# Altium PCB PCB1.PcbDoc
Units mm, origin at the board's own origin, x right, y up, seen from the top; angles counter-clockwise.
Board outline 95 x 50 mm, 2 copper layers (Top Layer, Bottom Layer); 30 components, 16 nets, 106 pads, 11 vias.
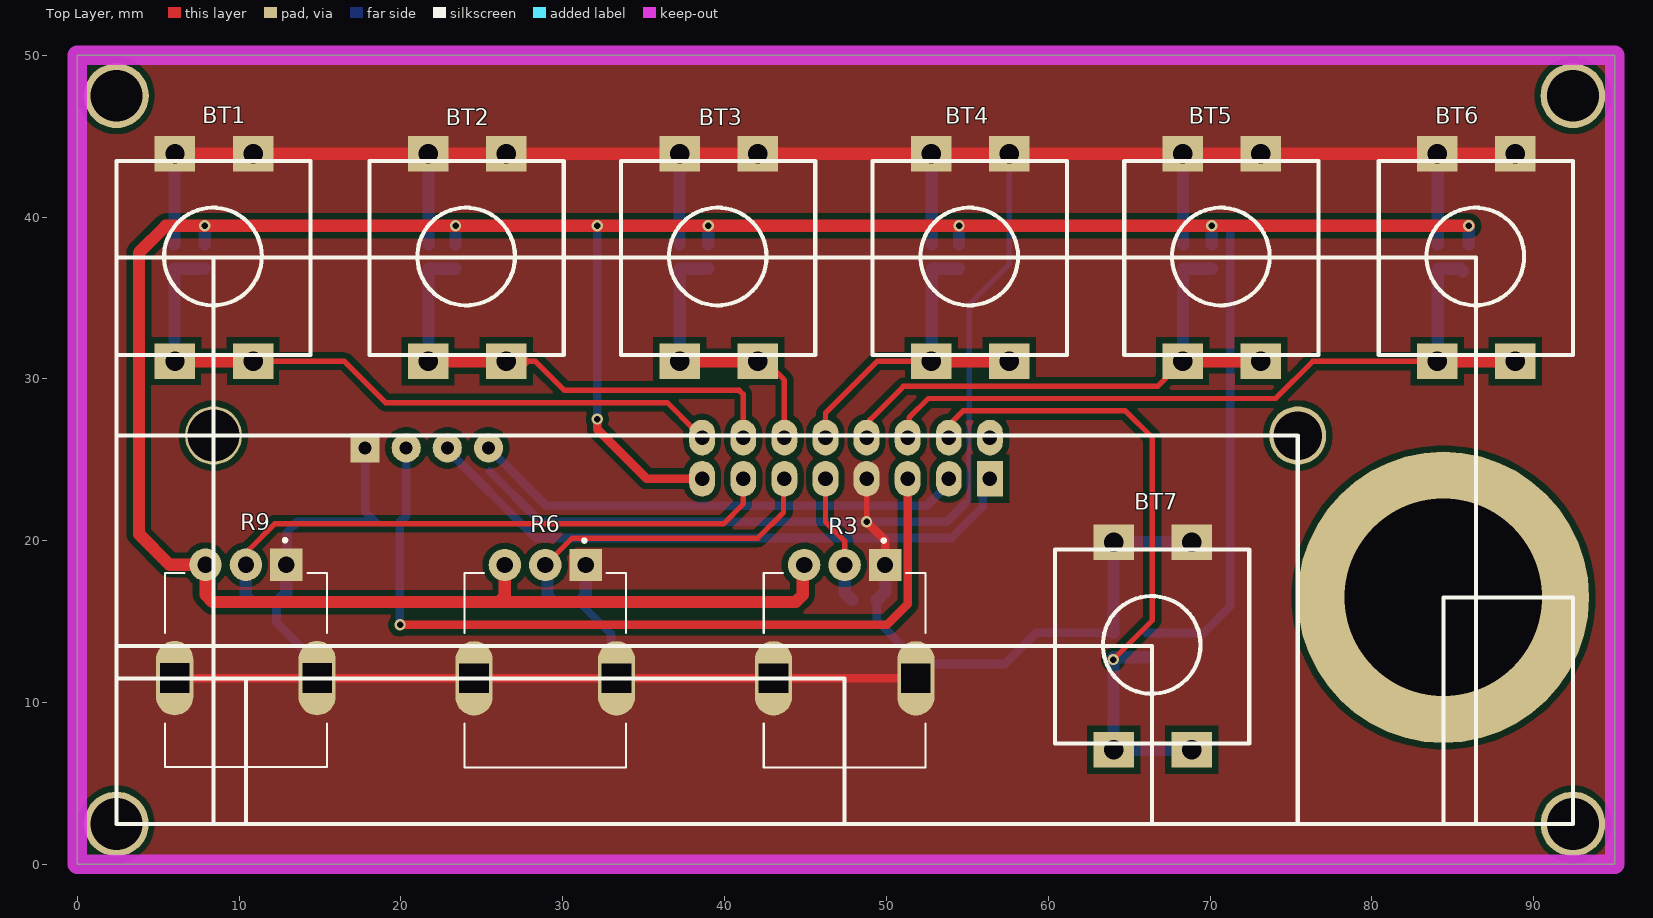
[diagram p0: Top Layer view]
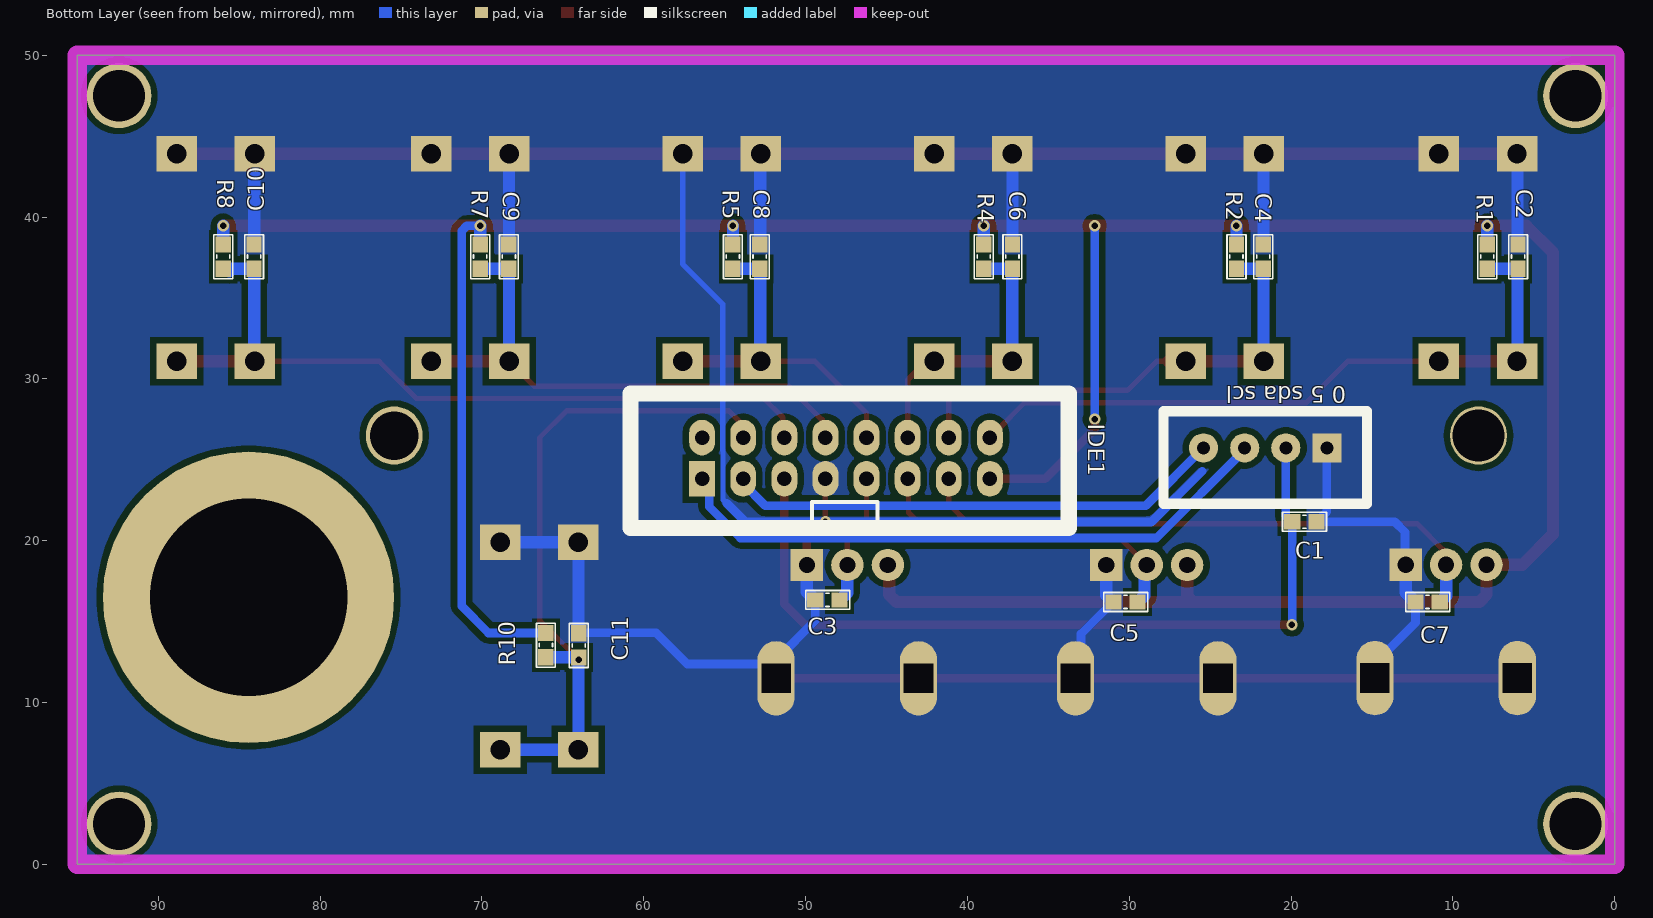
[diagram p1: Bottom Layer view, seen from below]
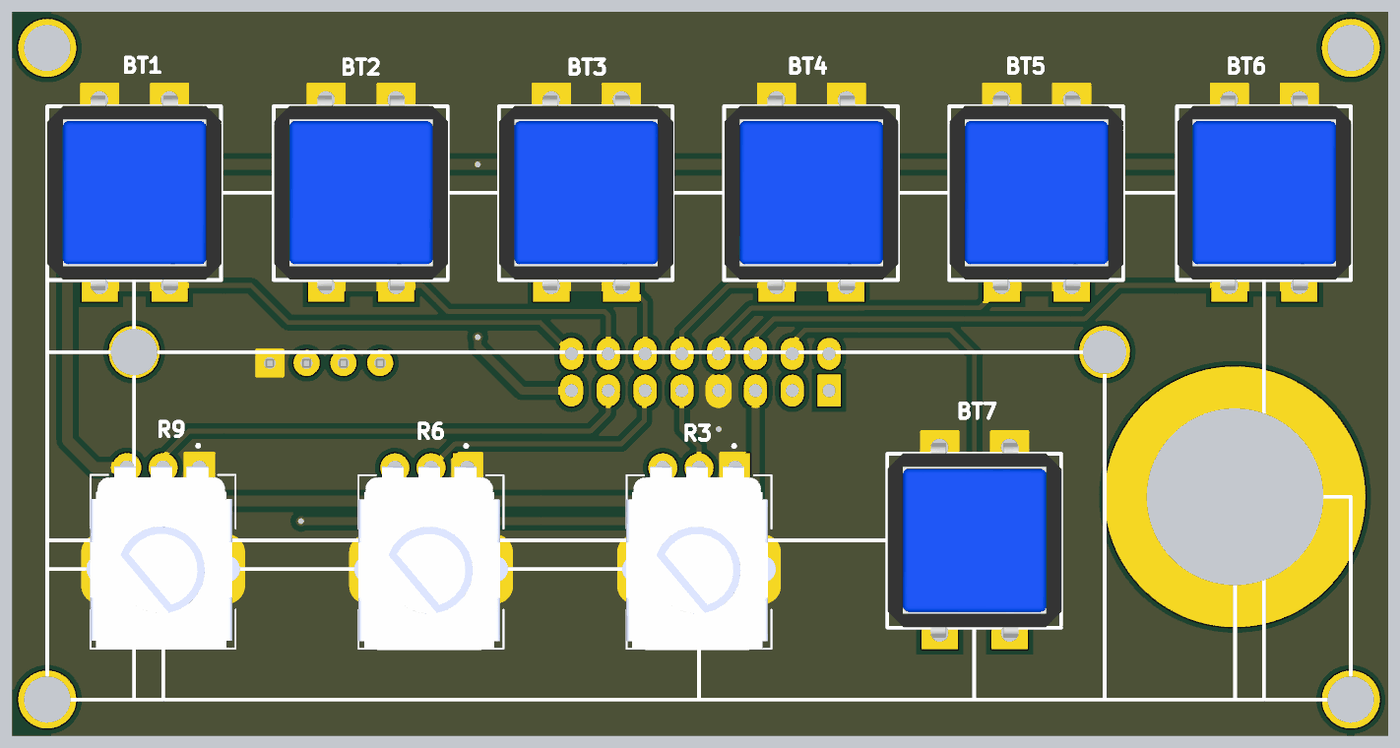
[diagram p2: 3D render of the assembled board from above, using the file's embedded part models]
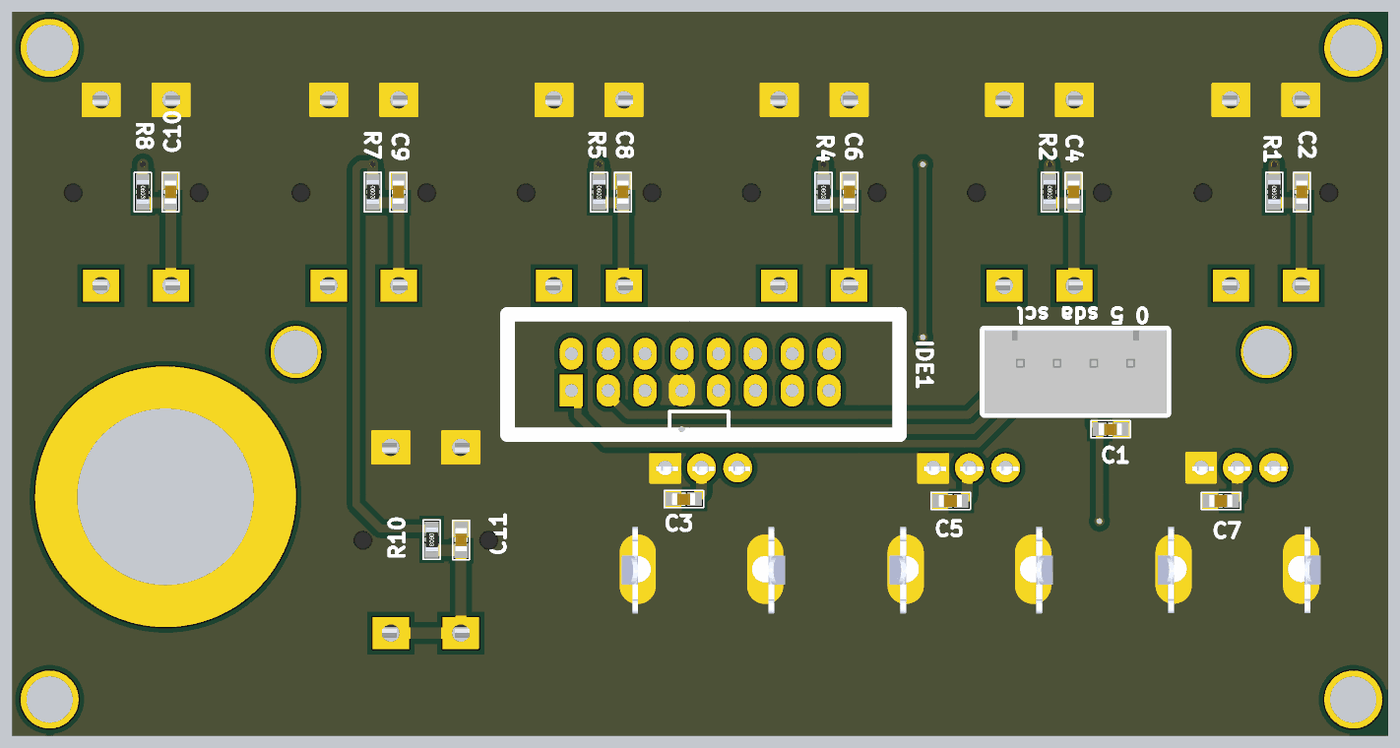
[diagram p3: 3D render of the assembled board from below, using the file's embedded part models]

## Layer stack, top to bottom
Top Solder: solder mask 0.0102, Solder Resist, Dk 3.5
Top Layer: signal copper 0.0356
Dielectric 1: dielectric 0.32, FR-4, Dk 4.8
Bottom Layer: signal copper 0.0356
Bottom Solder: solder mask 0.0102, Solder Resist, Dk 3.5

## Board outline
0,0 0,50 95,50 95,0

## Design rules (kind name [scope] priority, off if disabled: settings)
Clearance [All] p1: gap=0.381 ignorepadtopadclearanceinfootprint=FALSE
PlaneConnect [All] p1: planeconnectstyle=Direct reliefexpansion=0.508 reliefentries=4 reliefconductorwidth=0.254 reliefairgap=0.254
PolygonConnect [All] p1: connectstyle=Direct reliefconductorwidth=0.254 reliefentries=4 polygonreliefangle="90 Angle" airgapwidth=0.254
RoomDefinition Sheet1 [InComponentClass('Sheet1')] p1: confinementstyle=ConfineIn formatcopy=TRUE lockcomponents=FALSE outline 150.118,-42.202 382.401,-42.202 382.401,-11.214 150.118,-11.214
RoutingVias [All] p1: holewidth=0.4 width=0.7 viastyle="Through Hole" minholewidth=0.4 minwidth=0.7 maxholewidth=0.4 maxwidth=0.7
SolderMaskExpansion [All] p1: expansion=0.102 istentingtop=FALSE
Width [All] p1: maxlimit=0.762 minlimit=0.33 preferedwidth=0.533
29 further rules are at their usual default settings.

## Classes and differential pairs
component class Sheet1: "0 5 sda scl" BT1 BT2 BT3 BT4 BT5 BT6 BT7 C1 C2 C4 C6 C7 C8 C9 C10 C11 IDE1 R1 R2 R3 R4 R5 R6 R7 R8 R9 R10

## Components (designator, comment, footprint, x,y, rotation, side; value= is the part's Value field where it differs from the comment)
"0 5 sda scl" "Header 4P 2.54 Duc Thang" XH2.54M-4 17.784,25.743 r0 bottom (schematic designator LCD)
BT1 "Nut Nhan 4 chan 12x12" "12X12 BUTTOM Blue" 8.417,37.502 r90 top locked
BT2 "Nut Nhan 4 chan 12x12" "12X12 BUTTOM Blue" 24.058,37.502 r90 top locked
BT3 "Nut Nhan 4 chan 12x12" "12X12 BUTTOM Blue" 39.603,37.502 r90 top locked
BT4 "Nut Nhan 4 chan 12x12" "12X12 BUTTOM Blue" 55.147,37.502 r90 top locked
BT5 "Nut Nhan 4 chan 12x12" "12X12 BUTTOM Blue" 70.692,37.502 r90 top locked
BT6 "Nut Nhan 4 chan 12x12" "12X12 BUTTOM Blue" 86.417,37.502 r90 top locked
BT7 "Nut Nhan 4 chan 12x12" "12X12 BUTTOM Blue" 66.417,13.502 r90 top locked
C1 "101" "tu 0603" 19.181,21.171 r180 bottom
C2 "101" "tu 0603" 5.973,37.554 r270 bottom
C3 "101" "tu 0603" 48.645,16.345 r180 bottom
C4 "101" "tu 0603" 21.721,37.554 r270 bottom
C5 "101" "tu 0603" 30.23,16.218 r180 bottom
C6 "101" "tu 0603" 37.215,37.554 r270 bottom
C7 "101" "tu 0603" 11.561,16.218 r180 bottom
C8 "101" "tu 0603" 52.836,37.554 r270 bottom
C9 "101" "tu 0603" 68.33,37.554 r270 bottom
C10 "101" "tu 0603" 84.078,37.554 r270 bottom
C11 "101" "tu 0603" 64.012,13.539 r270 bottom
IDE1 "IDE16" "IDE16 DT" 56.392,23.838 r180 bottom
R1 "10k" "tro smd 0603" 7.878,37.554 r270 bottom
R2 "10k" "tro smd 0603" 23.372,37.554 r270 bottom
R3 "PT01-D225D-A503" TRIM_PT01-D225D-A503 47.417,11.502 r180 top
R4 "10k" "tro smd 0603" 38.993,37.554 r270 bottom
R5 "10k" "tro smd 0603" 54.487,37.554 r270 bottom
R6 "PT01-D225D-A503" TRIM_PT01-D225D-A503 28.917,11.502 r180 top
R7 "10k" "tro smd 0603" 70.108,37.554 r270 bottom
R8 "10k" "tro smd 0603" 85.983,37.554 r270 bottom
R9 "PT01-D225D-A503" TRIM_PT01-D225D-A503 10.418,11.519 r180 top
R10 "10k" "tro smd 0603" 66.044,13.551 r270 bottom

## Footprints (in the part's own frame and the unit in brackets; to place one, negate y for a bottom-side part, rotate by r counter-clockwise, add the part's x,y. Pads: shape width x height; smd on the part's side, far side on the other; paste and mask are expansions set on the pad)
"12X12 BUTTOM Blue" [mm]
  rect 2.2x2.5 hole 1.2: 1(-6.413,2.38) 2(-6.413,-2.446) 3(6.413,2.38) 4(6.413,-2.446)
  silkscreen extent -6.03,-6 5.97,6, body extent -6.71,-6.03 6.71,5.98, height 8.84
"IDE16 DT" [mm]
  rect 1.6x2.2 hole 0.9: 1(0,0)
  oval 1.6x2.2 hole 0.9: 2(0,2.54) 3(2.54,0) 4(2.54,2.54) 5(5.08,0) 6(5.08,2.54) 7(7.62,0) 8(7.62,2.54) 9(10.16,0) 10(10.16,2.54) 11(12.7,0) 12(12.7,2.54) 13(15.24,0) 14(15.24,2.54) 15(17.78,0) 16(17.78,2.54)
  silkscreen extent -4.42,-3.05 22.66,5.27
TRIM_PT01-D225D-A503 [mm]
  rect 2x2 hole 1: 1(-2.5,-7)
  round 2 hole 1: 2(0,-7) 3(2.5,-7)
  oval 2.3x4.6 hole 1.8 square: S1(-4.4,0) S2(4.4,0)
  silkscreen extent -5,-8.61 5,5.5, body extent -5.51,-7.08 5.76,5.57, height 23.6
"tro smd 0603" [mm] "Chip Capacitor, 2-Leads, Body 1,60x0,80mm, IPC Medium Density"
  rect 1x0.95 smd mask+0.076: 1(-0.75,0) 2(0.75,0)
  silkscreen extent -1.35,-0.58 1.37,0.58, body extent -0.82,-0.42 0.82,0.43, height 0.44
"tu 0603" [mm] "Chip Capacitor, 2-Leads, Body 1,60x0,80mm, IPC Medium Density"
  rect 1x0.95 smd mask+0.076: 1(-0.75,0) 2(0.75,0)
  silkscreen extent -1.35,-0.58 1.37,0.58, body extent -0.8,-0.4 0.8,0.4, height 0.9
XH2.54M-4 [mm]
  rect 1.8x1.8 hole 0.8: 1(0,0)
  round 1.8 hole 0.8: 2(2.54,0) 3(5.08,0) 4(7.62,0)
  silkscreen extent -2.48,-2.26 10.1,3.46, body extent -2.48,-2.26 10.1,3.48, height 6.91

## Part data
"0 5 sda scl": "Cắm", Chung_Loai=Cắm, Don_Vi=Con, Ma_Hang=MH001285, Ten_Linh_Kien="Header 4P XH2.54-4P Đực Thẳng"
C1 C2 C3 C4 C5 C6 C7 C8 C9 C10 C11: library part "Tu 0603 104 50V 10%", "Dán", Chung_Loai=Dán, Don_Vi=Con, Ma_Hang=MH004568, So_Chan=2, Ten_Linh_Kien="Tụ 0603 104-100nF 10% 50V"
IDE1: library part "IDE 16 DT"
R1 R2 R4 R5 R7 R8 R10: library part "Tro 0603 5% 10k", "Dán", Chung_Loai=Dán, Don_Vi=Con, Ma_Hang=MH006316, So_Chan=2, Ten_Linh_Kien="Trở 0603 5% 10k"
R3 R6 R9: "10 mm, Vertical, Logarithmic, 50 kÎ©, Through Hole, D-cut Rotary Potentiometer", Package=None, Check_prices=https://www.snapeda.com/parts/PT01-D225D-A503/Same+Sky/view-part/?ref=eda, MF="Same Sky", MP=PT01-D225D-A503, SnapEDA_Link=https://www.snapeda.com/parts/PT01-D225D-A503/Same+Sky/view-part/?ref=snap

## Free pads (board coordinates)
  round 18 hole 12.2: 3(84.417,16.502)
  round 4 hole 3.2: 4(2.417,2.502) 4(2.417,47.502) 4(92.417,2.502) 4(92.417,47.502)
  oval 3.5x3.6 hole 3.2: 4(8.417,26.502)
  oval 3.5x3.6 hole 3: 4(75.417,26.502)

## Via types
v1: diameter 0.7, hole 0.4, Top Layer to Bottom Layer, tented both sides, 11 vias

## Nets (pads, with @x,y where several pads share a name; then routed paths per layer and width w, separated by ;. In a path a pad name is that pad's centre, name@x,y a point inside that pad or via, vN(x,y) a via of type N, cw(c..) or ccw(c..) an arc to the next point about the centre after c; other vN are vias at no path point)
+5: "0 5 sda scl.2" C1.1 IDE1.5 | length 50.7
  Top Layer w0.533: v1(19.943,14.821) 50.042,14.821 51.312,16.091 IDE1.5
  Bottom Layer w0.533: v1(19.943,14.821) 19.937,14.827 19.937,21.165 C1.1 19.956,21.171 20.324,21.539 20.324,25.743
GND: "0 5 sda scl.1" BT1.3 BT1.4 BT2.3 BT2.4 BT3.3 BT3.4 BT4.3 BT4.4 BT5.3 BT5.4 BT6.3 BT6.4 BT7.3 BT7.4 C1.2 C2.1 C3.1 C4.1 C5.1 C6.1 C7.1 C8.1 C9.1 C10.1 C11.1 IDE1.7 R3.1 R3.S1 R3.S2 R6.1 R6.S1 R6.S2 R9.1 R9.S1 R9.S2 | length 283.2
  Top Layer w0.33: v1(48.772,21.171) IDE1.7
  Top Layer w0.533: R9.S2 6.027,11.511 51.808,11.511 R3.S1 ; v1(48.772,21.171) 49.917,20.026 R3.1
  Top Layer w0.762: BT1.3 BT1.4 BT2.3 BT2.4 BT3.3 BT3.4 BT4.3 BT4.4 BT5.3 BT5.4 BT6.3 BT6.4
  Bottom Layer w0.33: 54.868,22.314 55.098,22.544 55.098,25.113 55.098,25.562 55.122,25.586 55.122,34.633 57.593,37.104 BT4.4
  Bottom Layer w0.533: C7.1 12.311,14.943 14.818,12.436 R9.S1 ; R9.1 12.958,18.559 12.958,20.536 13.593,21.171 C1.2@18.406,21.171 ; 17.784,25.743 17.784,21.793 C1.2@18.406,21.171 ; C1.2 C1.2@18.406,21.171 ; 25.478,24.308 28.615,21.171 v1(48.772,21.171) 53.725,21.171 54.868,22.314 ; C5.1 31.005,16.218 32.979,14.244 32.979,11.84 R6.S1 ; C3.1 49.395,15.07 51.817,12.648 R3.S1@51.817,11.569 ; R3.S1 R3.S1@51.817,11.569 ; C11.1@64.024,14.301 64.013,14.313 59.238,14.313 57.31,12.385 52.633,12.385 R3.S1@51.817,11.569
  Bottom Layer w0.762: C2.1 6.005,38.336 6.005,43.884 BT1.3 ; C7.1 12.336,16.218 12.918,16.8 R9.1 ; BT2.3 21.699,43.894 21.699,38.326 C4.1 ; C5.1@31.005,16.218 31.417,16.63 R6.1 ; C6.1 BT3.3@37.215,43.908 ; C3.1 49.42,16.345 49.917,16.842 R3.1 ; BT4.3 52.801,43.881 52.801,38.339 C8.1 ; C11.1@64.024,14.301 64.024,19.903 BT7.3 BT7.4 ; BT5.3 68.321,43.906 68.321,38.313 C9.1 ; BT6.3 84.057,43.895 84.057,38.325 C10.1
IN1: BT1.1 BT1.2 C2.2 IDE1.16 R1.2 | length 42.2
  Top Layer w0.33: BT1.2 16.502,31.089 19.054,28.537 36.453,28.537 38.107,26.883 38.118,26.883 38.612,26.389 IDE1.16
  Top Layer w0.762: BT1.1 BT1.2
  Bottom Layer w0.762: BT1.1 6.005,31.12 6.005,36.772 C2.2 R1.2
IN2: BT2.1 BT2.2 C4.2 IDE1.14 R2.2 | length 30.4
  Top Layer w0.33: BT2.2@27.563,31.089 28.313,31.089 30.103,29.299 40.898,29.299 41.152,29.045 IDE1.14
  Top Layer w0.762: BT2.1 BT2.2 BT2.2@27.563,31.089
  Bottom Layer w0.762: BT2.1 21.699,31.11 21.699,36.782 C4.2 R2.2
IN3: BT3.1 BT3.2 C6.2 IDE1.12 R4.2 | length 18
  Top Layer w0.33: BT3.2 42.537,31.089 43.692,29.934 IDE1.12
  Top Layer w0.762: BT3.1 BT3.2
  Bottom Layer w0.762: C6.2 R4.2 ; BT3.1 C6.2@37.222,36.797
IN4: BT4.1 BT4.2 C8.2 IDE1.10 R5.2 | length 21.6
  Top Layer w0.33: IDE1.10 46.232,27.902 49.419,31.089 BT4.1
  Top Layer w0.762: BT4.1 BT4.2
  Bottom Layer w0.762: BT4.1 52.801,31.123 52.801,36.769 C8.2 R5.2
IN5: BT5.1 BT5.2 C9.2 IDE1.8 R7.2 | length 34.3
  Top Layer w0.33: IDE1.8 48.977,26.583 48.977,27.472 51.047,29.542 58.819,29.542 58.83,29.553 66.776,29.553 BT5.1
  Top Layer w0.762: BT5.1 BT5.2
  Bottom Layer w0.762: BT5.1 68.321,31.098 68.321,36.795 C9.2 R7.2
IN6: BT6.1 BT6.2 C10.2 IDE1.6 R8.2 | length 47.5
  Top Layer w0.33: IDE1.6 51.406,26.472 51.406,27.615 52.582,28.791 74.045,28.791 76.343,31.089 BT6.1
  Top Layer w0.762: BT6.1 BT6.2
  Bottom Layer w0.762: BT6.1 84.057,31.109 84.057,36.783 C10.2 85.463,36.804 R8.2@85.602,36.665
IN7: BT7.1 BT7.2 C11.2 IDE1.4 R10.2 | length 41.7
  Top Layer w0.33: IDE1.4 54.057,26.583 54.057,27.345 54.741,28.029 64.774,28.029 66.425,26.378 66.425,15.075 v1(64.012,12.662)
  Bottom Layer w0.762: R10.2 66.038,12.795 64.018,12.795 C11.2 64.024,12.777 64.024,7.101 BT7.1 BT7.2
IN8: IDE1.2
SCL: "0 5 sda scl.4" IDE1.3 | length 30.8
  Bottom Layer w0.533: 25.404,25.743 28.978,22.169 52.483,22.169 53.852,23.538 IDE1.3
SDA: "0 5 sda scl.3" IDE1.1 | length 38.2
  Bottom Layer w0.533: 22.864,25.743 22.864,25.629 28.32,20.173 54.02,20.173 55.959,22.112 55.959,23.405 IDE1.1
VCC: IDE1.15 R1.1 R2.1 R3.3 R4.1 R5.1 R6.3 R7.1 R8.1 R9.3 R10.1 | length 206.2
  Top Layer w0.533: v1(32.135,27.521) 32.135,26.886 35.183,23.838 IDE1.15
  Top Layer w0.762: R6.3 26.417,16.596 26.039,16.218 ; R3.3 44.835,18.42 44.835,16.664 44.389,16.218 26.039,16.218 ; v1(85.983,39.459) v1(70.108,39.459) v1(54.487,39.459) v1(38.993,39.459) v1(32.135,39.459) v1(23.372,39.459) v1(7.878,39.459) 5.465,39.459 3.814,37.808 3.814,20.409 5.704,18.519 R9.3 7.918,16.664 8.364,16.218 26.039,16.218
  Bottom Layer w0.533: v1(32.135,27.521) v1(32.135,39.459) ; R10.1 69.588,14.301 71.251,15.964 71.251,39.147 70.939,39.459 v1(70.108,39.459)
  Bottom Layer w0.762: R1.1 v1(7.878,39.459) ; R2.1 v1(23.372,39.459) ; R4.1 v1(38.993,39.459) ; R5.1 v1(54.487,39.459) ; R7.1 v1(70.108,39.459) ; R8.1 v1(85.983,39.459)
vr1: C3.2 IDE1.9 R3.2 | length 8.2
  Top Layer w0.33: IDE1.9 46.232,21.171 47.417,19.986 R3.2
  Bottom Layer w0.762: R3.2 47.417,16.798 47.87,16.345 C3.2
vr2: C5.2 IDE1.11 R6.2 | length 20.7
  Top Layer w0.33: R6.2 30.57,20.155 42.041,20.155 43.64,21.754 43.64,23.786 IDE1.11
  Bottom Layer w0.762: R6.2 29.06,18.359 29.06,16.613 29.455,16.218 C5.2
vr3: C7.2 IDE1.13 R9.2 | length 36.8
  Top Layer w0.33: R9.2 10.598,18.699 10.598,19.446 12.196,21.044 39.925,21.044 41.152,22.271 IDE1.13
  Bottom Layer w0.762: R9.2 10.418,16.586 10.786,16.218 C7.2

## Polygon pours and split planes (outlines as drawn)
GND on Bottom Layer "GND_L02_P000" (solid, pour order 0): 0,50 95,50 95,0 0,0
GND on Top Layer "GND_L01_P001" (solid, pour order 1): 0,50 95,50 95,0 0,0

## Keep-outs
Keep-Out Layer:
  the board outline again, w1.2

## Silkscreen, mask and mechanical layers (free items; w line width, h text height)
Top Overlay:
  lines w0.254: 2.417,2.502 47.417,2.502 47.417,11.502 2.417,11.502 ; 2.417,2.502 2.417,11.502 ; 2.417,2.502 8.417,2.502 8.417,37.502 2.417,37.502 ; 2.417,2.502 2.417,37.502 ; 2.417,2.502 10.417,2.502 10.417,11.502 2.417,11.502 ; 2.417,2.502 2.417,11.502 ; 2.417,2.502 75.417,2.502 75.417,26.502 2.417,26.502 2.417,2.502 ; 2.417,2.502 86.417,2.502 86.417,37.502 2.417,37.502 ; 2.417,2.502 2.417,37.502 ; 2.417,2.502 66.417,2.502 66.417,13.502 2.417,13.502 2.417,2.502 ; 84.417,2.502 92.417,2.502 92.417,16.502 84.417,16.502 84.417,2.502